# EAGLE board tashtalk2-rpihat (EAGLE 6.5.0)
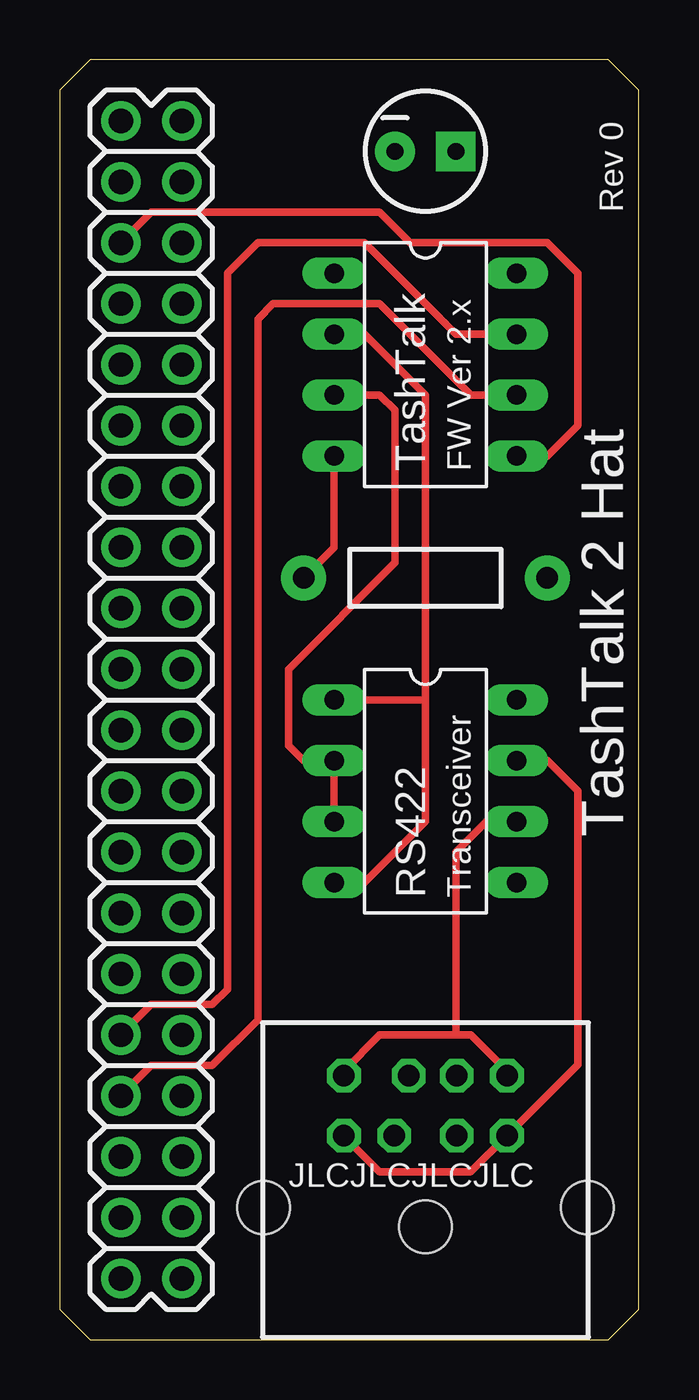
[diagram p0: board, top side]
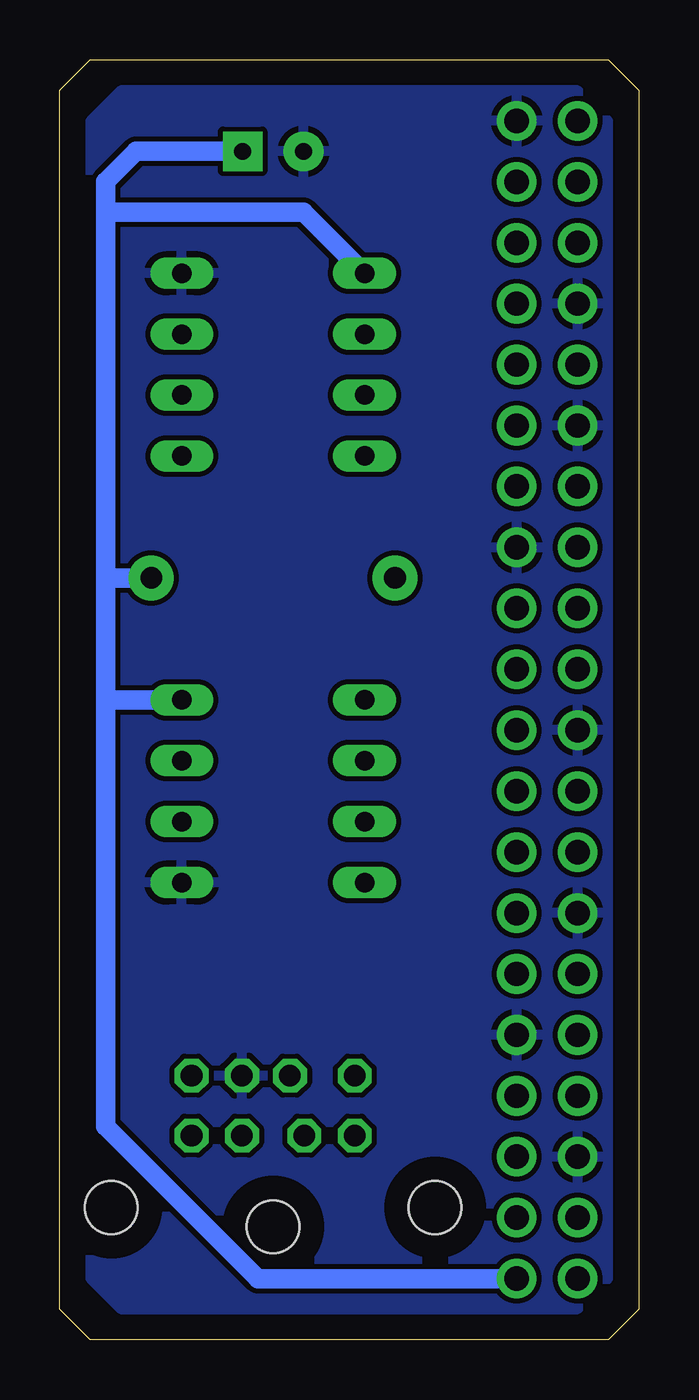
[diagram p1: board, bottom side, seen from below]

Size 24.13 x 53.34 mm. Coordinates in mm from the lower left corner, seen from the top.
Outline: 1.27,0 22.86,0 24.13,1.27 24.13,52.07 22.86,53.34 1.27,53.34 0,52.07 0,1.27 1.27,0
Copper layers (1*16): Top 0.035mm / dielectric 1.5mm / Bottom 0.035mm
Design rules "default": minimum track width 10mil, minimum drill 24mil, track to track 8mil, track to pad 8mil, pad to pad 8mil, via to via 8mil, smd to smd 8mil, copper to edge 40mil, drill to drill 8mil, minimum pad ring 10mil, minimum via ring 8mil, stop-mask expansion 4mil, vias tented up to drill 0mil, thermal gap 10mil

## Footprints (pad centres in the part's own frame; a part is rotated, then mirrored left to right if it is on the bottom)
2X20 = drill 1.016 pad 1.651: 1 -24.13,-1.27; 2 -24.13,1.27; 3 -21.59,-1.27; 4 -21.59,1.27; 5 -19.05,-1.27; 6 -19.05,1.27; 7 -16.51,-1.27; 8 -16.51,1.27; 9 -13.97,-1.27; 10 -13.97,1.27; 11 -11.43,-1.27; 12 -11.43,1.27; 13 -8.89,-1.27; 14 -8.89,1.27; 15 -6.35,-1.27; 16 -6.35,1.27; 17 -3.81,-1.27; 18 -3.81,1.27; 19 -1.27,-1.27; 20 -1.27,1.27; 21 1.27,-1.27; 22 1.27,1.27; 23 3.81,-1.27; 24 3.81,1.27; 25 6.35,-1.27; 26 6.35,1.27; 27 8.89,-1.27; 28 8.89,1.27; 29 11.43,-1.27; 30 11.43,1.27; 31 13.97,-1.27; 32 13.97,1.27; 33 16.51,-1.27; 34 16.51,1.27; 35 19.05,-1.27; 36 19.05,1.27; 37 21.59,-1.27; 38 21.59,1.27; 39 24.13,-1.27; 40 24.13,1.27
SSV-BC08 = drill 0.9 octagon: 1 1.3,8.5; 2 -1.3,8.5; 3 3.4,8.5; 4 1.3,11; 5 -3.4,8.5; 6 3.4,11; 7 -0.7,11; 8 -3.4,11 | hole 2.2: -6.75,5.5; 0,4.7; 6.75,5.5
DIL8 = drill 0.813 long: 1 -3.81,-3.81; 2 -1.27,-3.81; 3 1.27,-3.81; 4 3.81,-3.81; 5 3.81,3.81; 6 1.27,3.81; 7 -1.27,3.81; 8 -3.81,3.81
CPOL-RADIAL-10UF-25V = drill 0.7 pad 1.651 square: 1 1.27,0 | drill 0.7 pad 1.651: 2 -1.27,0
AXIAL-0.4 = drill 0.9 pad 1.88: P$1 -5.08,0; P$2 5.08,0

## Placement (x,y rotation side)
E$1  [2X20]  3.81,26.67 90 top
E$2  [SSV-BC08]  15.24,0 0 top
E$3  [DIL8]  15.24,22.86 270 top
E$4  [DIL8]  15.24,40.64 270 top
E$5  [CPOL-RADIAL-10UF-25V]  15.24,49.53 0 top
E$6  [AXIAL-0.4]  15.24,31.75 0 top

## Library data of the parts
E$1 = SparkFun-Connectors
E$2 = con-yamaichi
E$3 E$4 = microchip
E$5 = SparkFun-Capacitors
E$6 = SparkFun-Passives

## Nets
S$1: E$1.36 E$4.5
S$2: E$1.8 E$4.6
S$3: E$1.10 E$4.7
S$4: E$1.6 E$1.9 E$1.14 E$1.20 E$1.25 E$1.30 E$1.34 E$1.39 E$2.4 E$3.5 E$4.8 E$5.2
S$5: E$1.1 E$3.8 E$4.1 E$5.1 E$6.P$2
S$6: E$3.2 E$3.3 E$4.3
S$7: E$3.1 E$3.4 E$4.2
S$8: E$4.4 E$6.P$1
S$9: E$2.6 E$2.8 E$3.6
S$10: E$2.3 E$2.5 E$3.7

## Tracks (layer width: path | path; a pad name or v marks a point on that pad's centre or on a via)
S$1
  Top 0.305: E$4.5 20.32,36.83 21.59,38.1 21.59,44.45 20.32,45.72 14.61,45.72 13.34,46.99 3.81,46.99 E$1.36
S$2
  Top 0.305: E$1.8 3.81,11.43 6.35,11.43 8.26,13.34 8.26,42.55 8.89,43.18 13.34,43.18 17.14,39.37 E$4.6
S$3
  Top 0.305: E$1.10 3.81,13.97 6.35,13.97 6.99,14.61 6.99,44.45 8.26,45.72 12.7,45.72 16.51,41.91 E$4.7
S$4
  pour Bottom: 1.27,2.54 1.27,50.8 2.54,52.07 21.59,52.07 22.86,50.8 22.86,2.54 21.59,1.27 2.54,1.27
S$5
  Bottom 0.813: E$1.1 15.88,2.54 22.23,8.89 22.23,26.67 | 22.23,26.67 22.23,31.75 | 22.23,31.75 22.23,46.99 | E$6.P$2 22.23,31.75 | E$3.8 22.23,26.67 | E$4.1 13.97,46.99 22.23,46.99 | E$5.1 20.95,49.53 22.23,48.26 22.23,46.99
S$6
  Top 0.305: E$3.3 E$3.2 10.16,24.13 9.53,24.77 9.53,27.94 13.97,32.38 13.97,38.73 13.34,39.37 E$4.3
S$7
  Top 0.305: E$3.4 12.7,19.05 15.24,21.59 15.24,26.67 | E$4.2 12.7,41.91 15.24,39.37 15.24,26.67 | E$3.1 15.24,26.67
S$8
  Top 0.305: E$6.P$1 11.43,33.02 E$4.4
S$9
  Top 0.305: E$2.8 11.84,11.21 13.34,12.7 16.51,12.7 | E$2.6 18.64,11.21 17.14,12.7 16.51,12.7 | E$3.6 17.78,21.59 16.51,20.32 16.51,12.7
S$10
  Top 0.305: E$2.5 11.84,8.48 13.34,6.99 17.12,6.99 E$2.3 21.59,11.45 21.59,22.86 20.32,24.13 E$3.7

## Text on the board
tNames: Rev 0 | TashTalk | FW Ver 2.x | TashTalk 2 Hat | RS422 | Transceiver | JLCJLCJLCJLC